# Altium PCB sensor_zigbee_pcb.PcbDoc
Units mil, origin at the board's own origin, x right, y up, seen from the top; angles counter-clockwise.
Board outline 1181.1 x 1574.8 mil, 2 copper layers (Top Layer, Bottom Layer); 24 components, 20 nets, 111 pads, 24 vias.
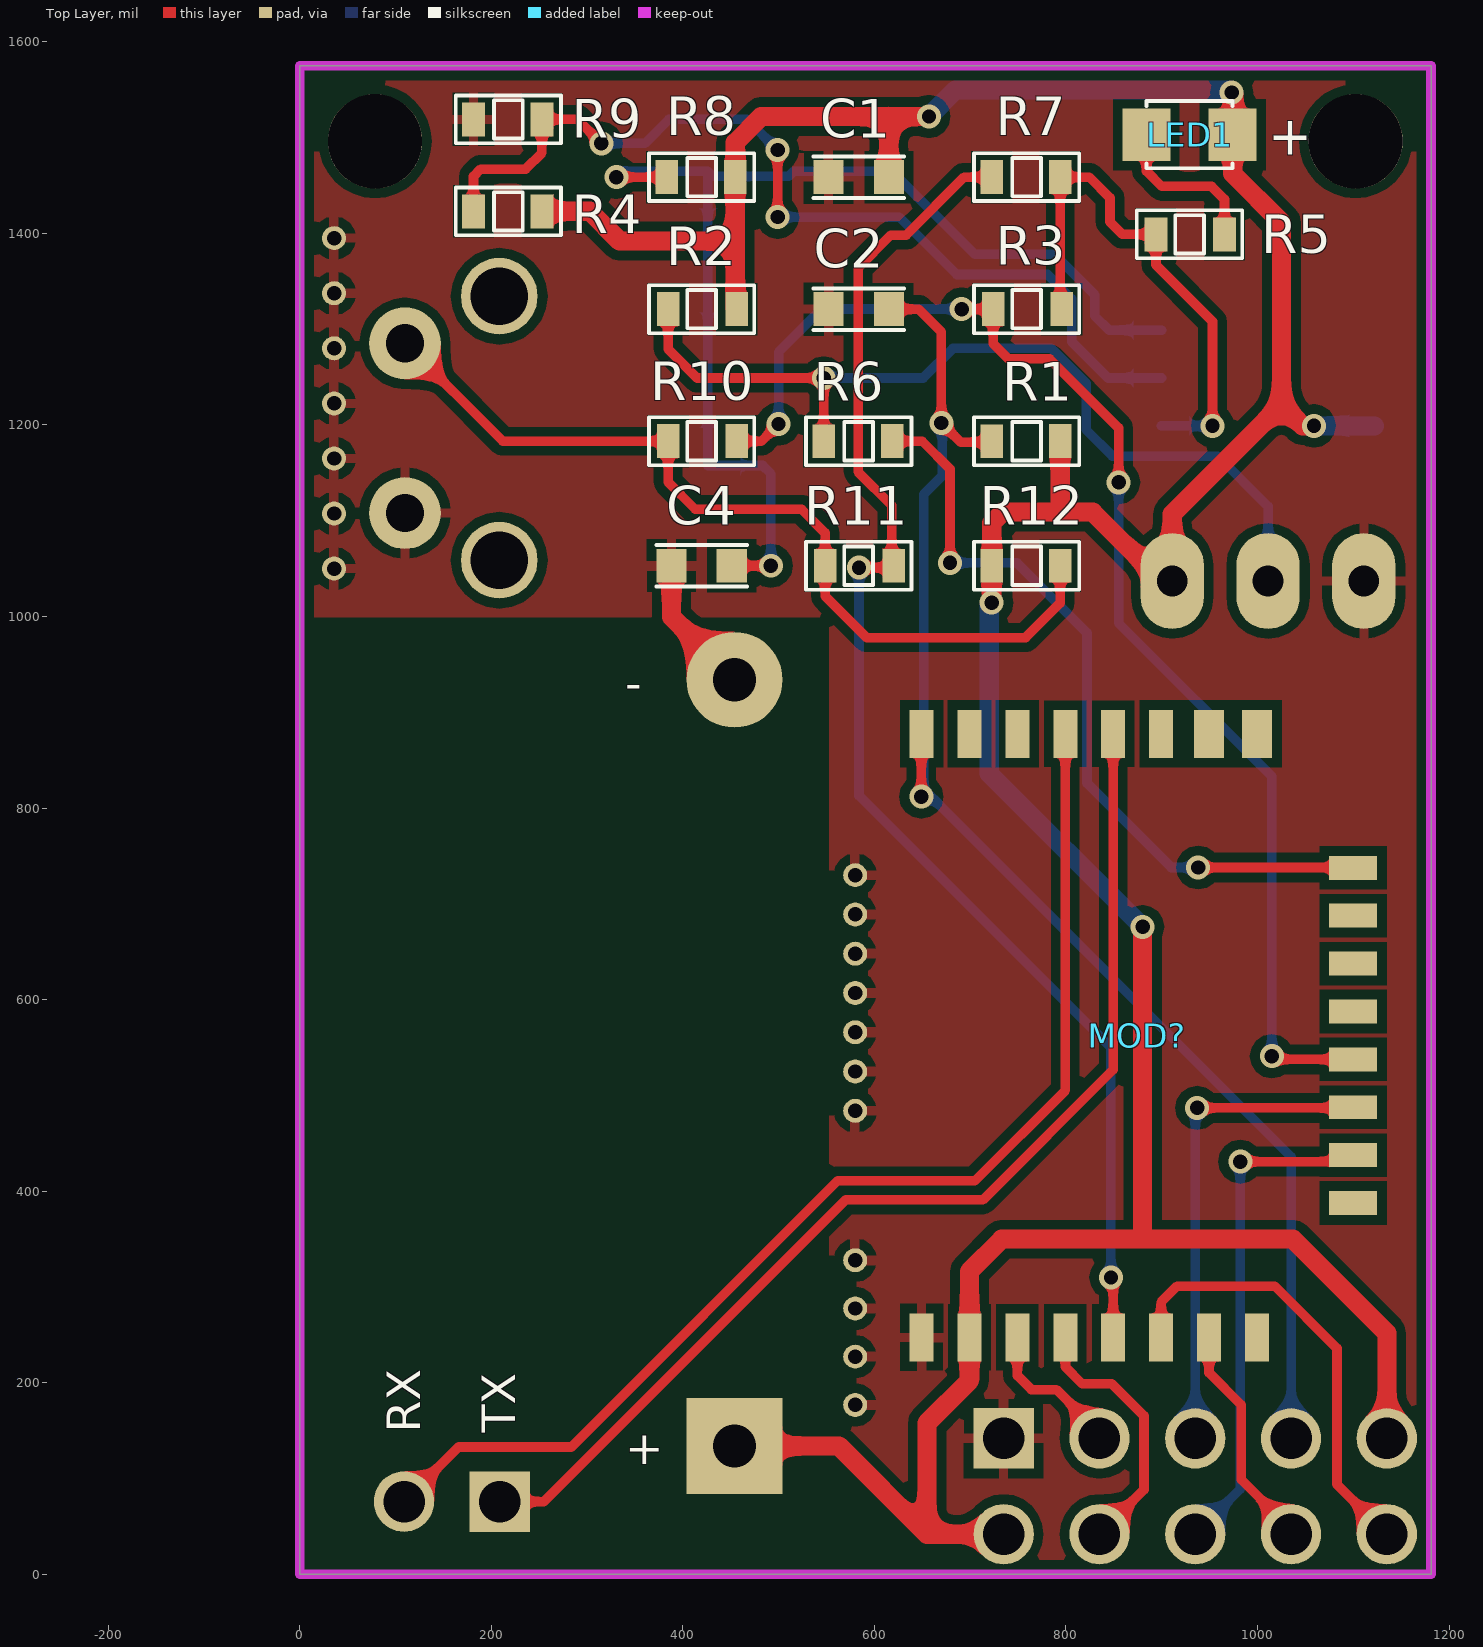
[diagram p0: Top Layer view]
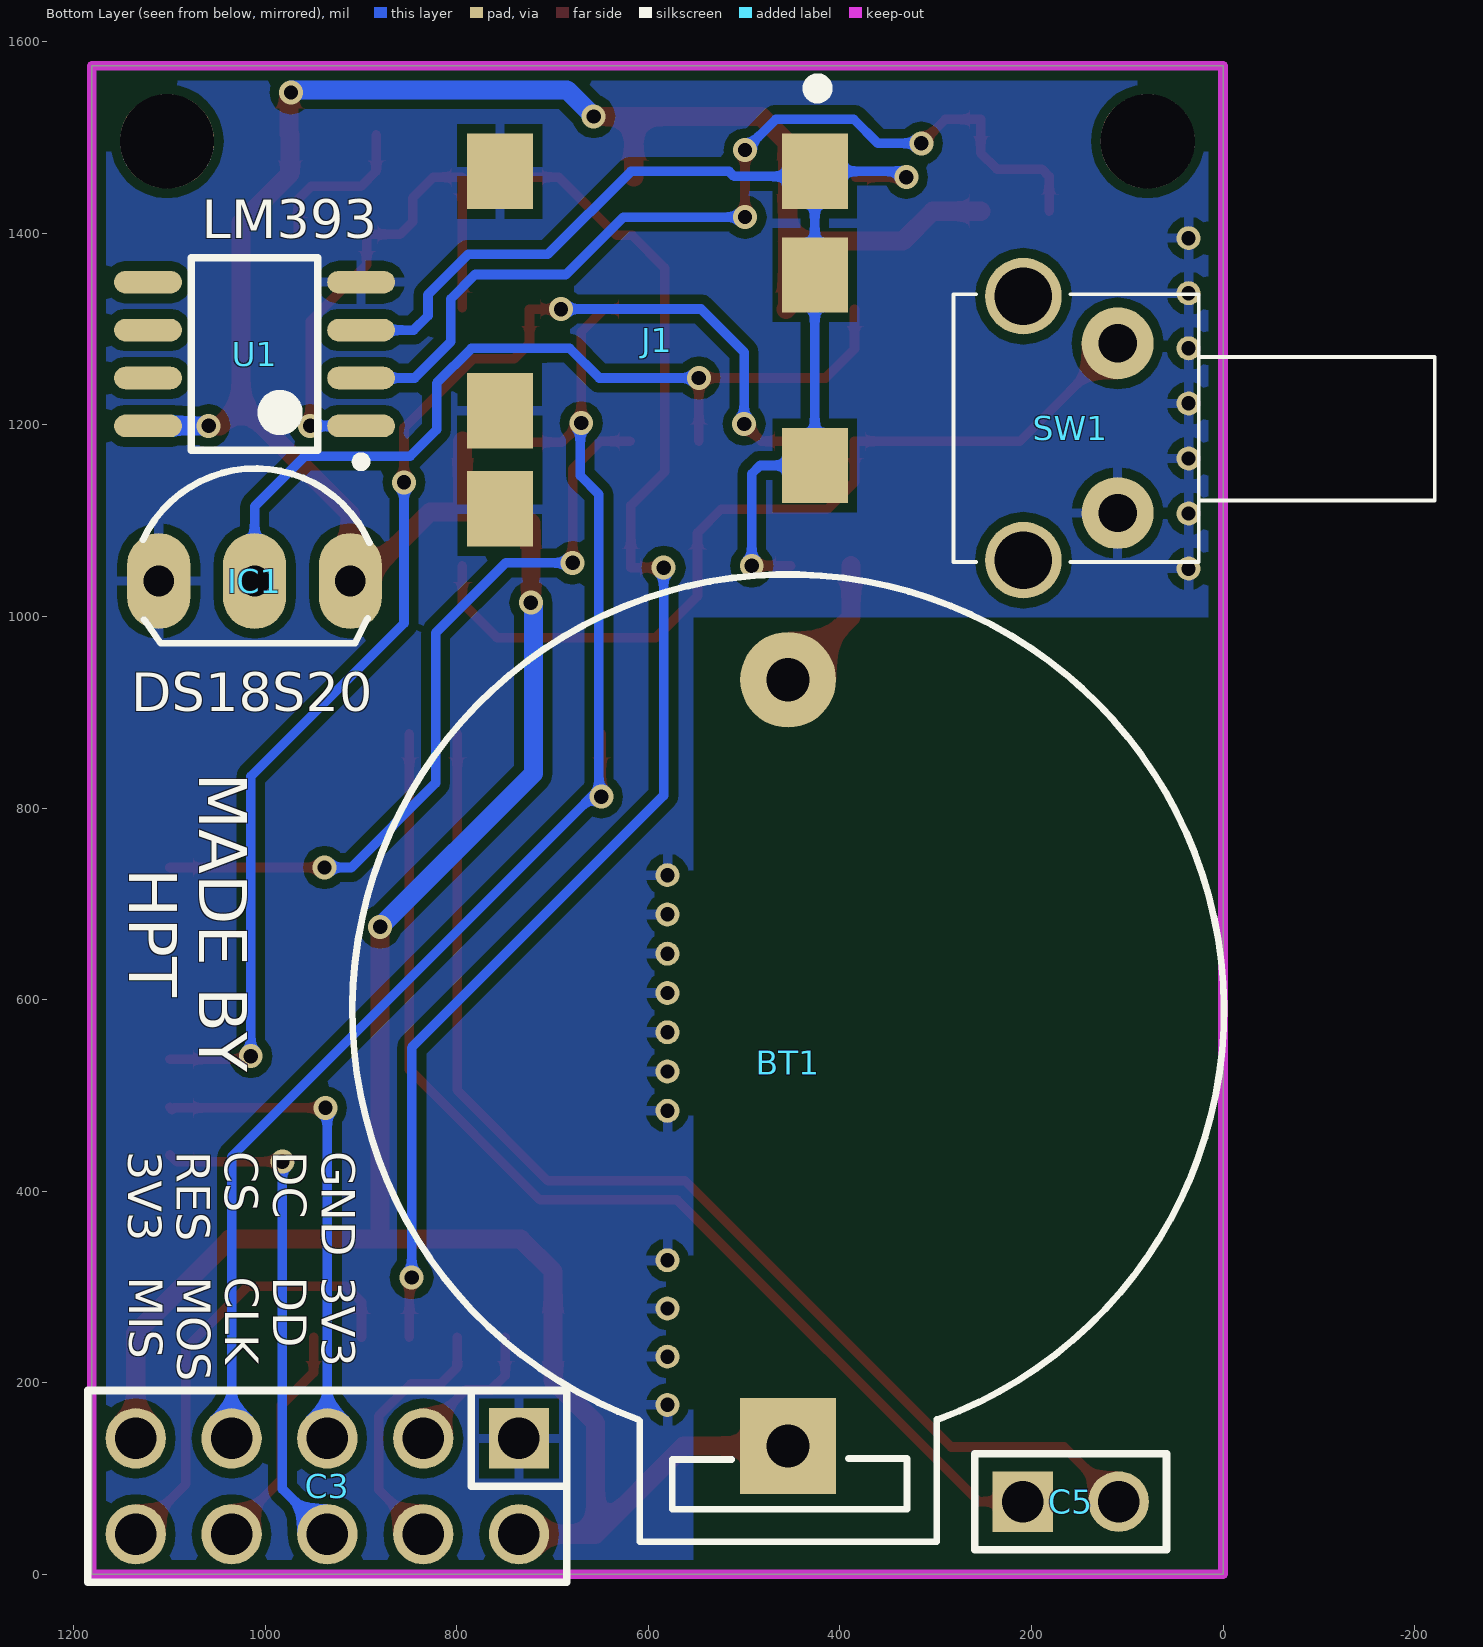
[diagram p1: Bottom Layer view, seen from below]
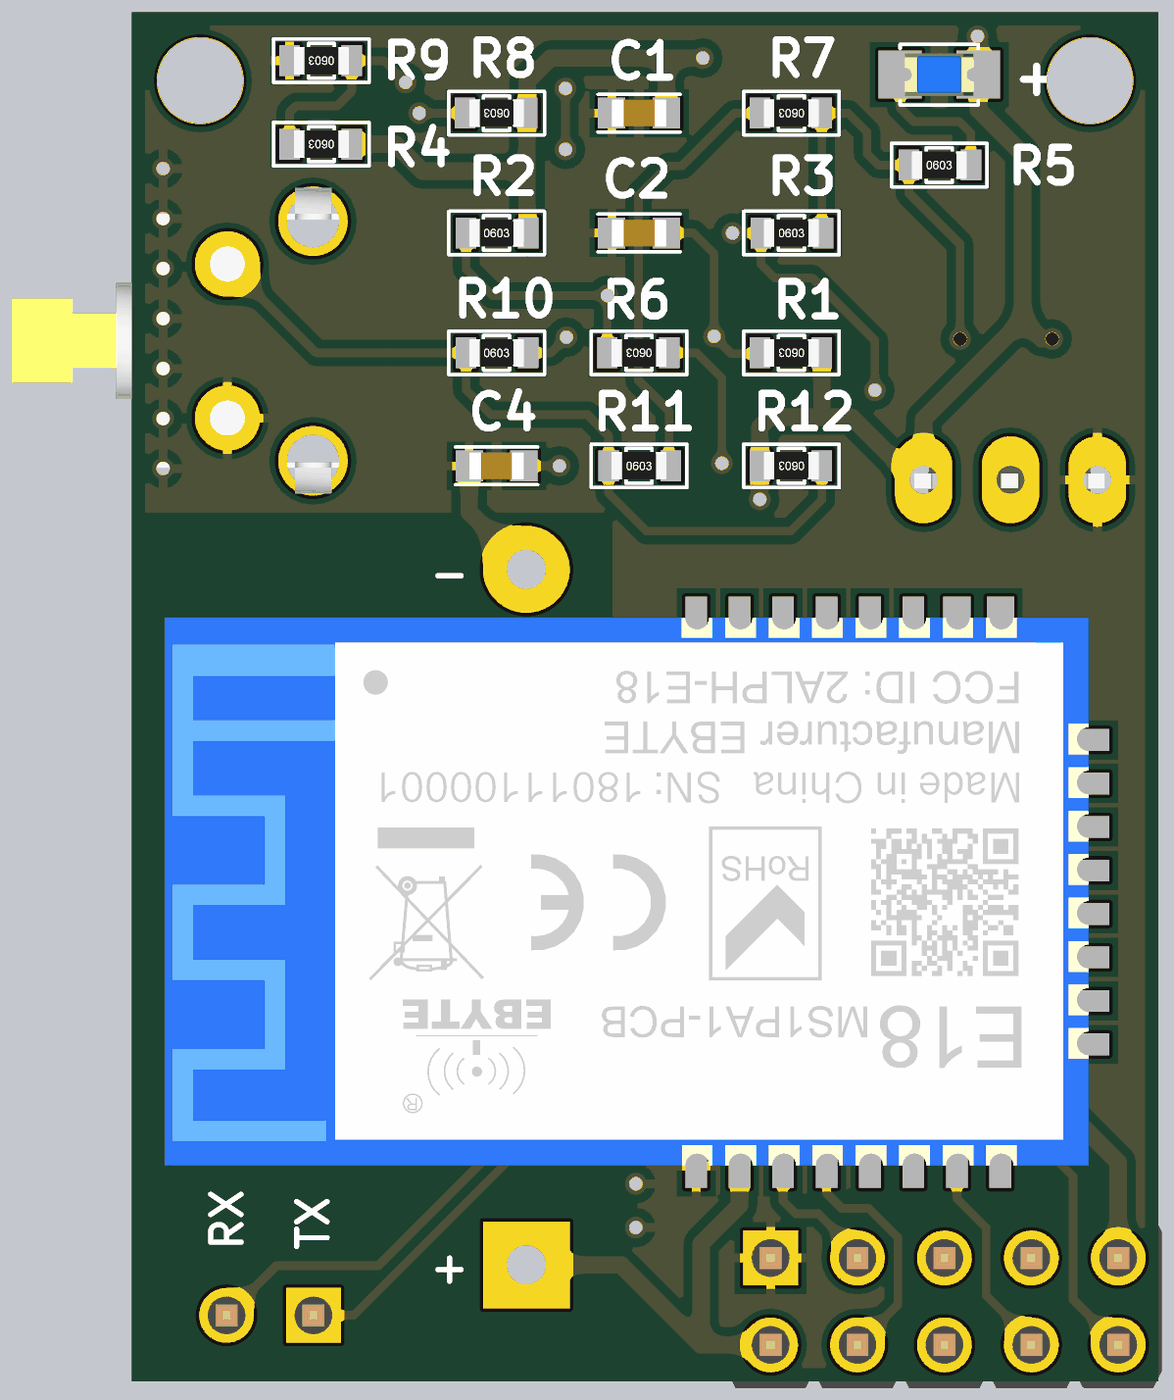
[diagram p2: 3D render of the assembled board from above, using the file's embedded part models]
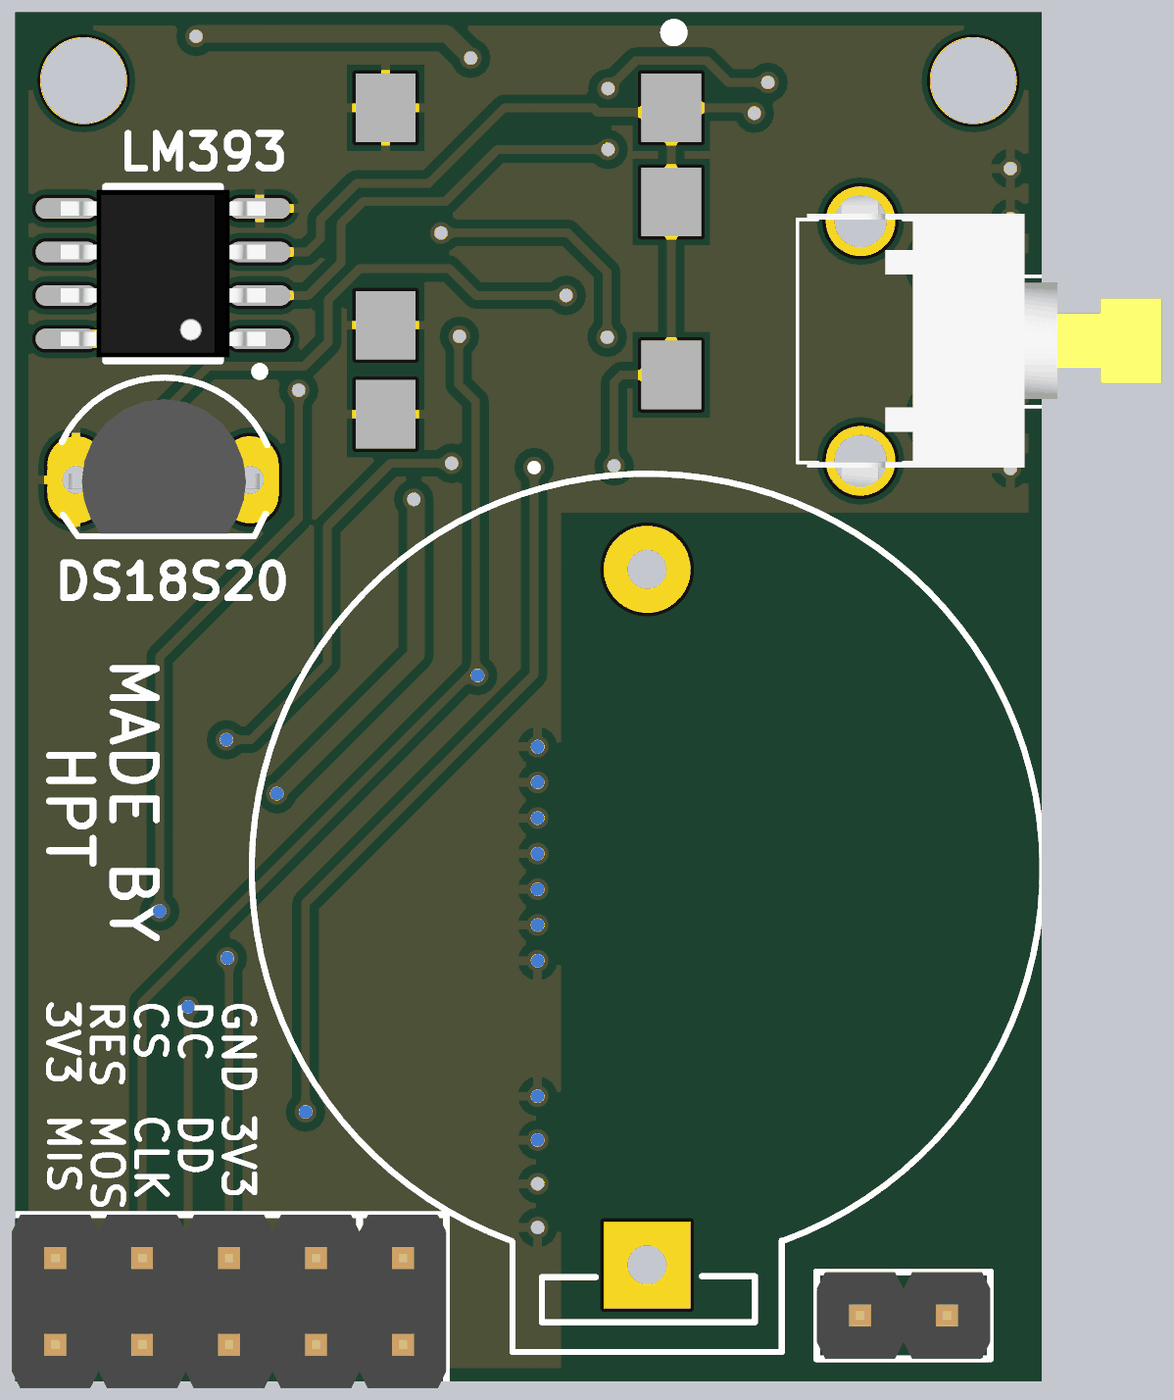
[diagram p3: 3D render of the assembled board from below, using the file's embedded part models]

## Layer stack, top to bottom
Top Solder: solder mask 0.4, Solder Resist, Dk 3.5
Top Layer: signal copper 1.4
Dielectric 1: dielectric 12.6, FR-4, Dk 4.8
Bottom Layer: signal copper 1.4
Bottom Solder: solder mask 0.4, Solder Resist, Dk 3.5

## Board outline
0,0 1181.1,0 1181.1,1574.8 0,1574.8

## Design rules (kind name [scope] priority, off if disabled: settings)
Clearance [All] p1: gap=10
PolygonConnect [All] p1: connectstyle=Relief reliefconductorwidth=10 reliefentries=4 polygonreliefangle="90 Angle" airgapwidth=10
RoomDefinition sensor_zigbee_schematic [InComponentClass('sensor_zigbee_schematic')] p1: confinementstyle=ConfineIn formatcopy=TRUE lockcomponents=FALSE outline -1230,-2375 770,-2375 770,-1375 -1230,-1375
RoutingVias [All] p1: holewidth=15 width=25 viastyle="Through Hole" minholewidth=15 minwidth=25 maxholewidth=28 maxwidth=50
SolderMaskExpansion [All] p1: expansion=4
Width [All] p1: maxlimit=50 minlimit=10 preferedwidth=10
30 further rules are at their usual default settings.

## Components (designator, comment, footprint, x,y, rotation, side; value= is the part's Value field where it differs from the comment)
BT1 "PIN 3V" PIN3V 454,134 r90 bottom
C1 "Capacitor SMD" CAP_0603 583.64,1458.65 r0 top
C2 "Capacitor SMD" CAP_0603 583.64,1320.83 r0 top
C3 "JP5x2" JP5-D2T 935,92 r0 bottom
C4 "Capacitor SMD" CAP_0603 419.72,1053 r0 top
C5 "JP2" JP2-D1T 209,76 r180 bottom
IC1 "DS18S20" DS18S20 1011,1037 r180 bottom
J1 "SJ-43504-SMT-TR" CUI_SJ-43504-SMT-TR 590.55,1325 r270 bottom
LED1 "+" LED-0805-Blue 974,1503 r180 top
MOD? "EBYTE-LORA-ZIGBEE-MODULE" EBYTE-LORA-ZIGBEE-MODULE 1185,862 r270 top
R1 "10K" RES-SMD-0603 759,1183 r180 top
R2 "4.7K" RES-SMD-0603 419.73,1320.83 r0 top
R3 "0R" RES-SMD-0603 759.01,1320.83 r0 top
R4 "10K" RES-SMD-0603 218,1423 r180 top
R5 "1K" RES-SMD-0603 929,1399 r0 top
R6 "0R" RES-SMD-0603 583.64,1183 r180 top
R7 "0R" RES-SMD-0603 759,1458.65 r180 top
R8 "10K" RES-SMD-0603 419.72,1458.65 r180 top
R9 "10K" RES-SMD-0603 217.99,1519 r180 top
R10 "10K" RES-SMD-0603 419.73,1183 r0 top
R11 "10K" RES-SMD-0603 583.64,1053 r0 top
R12 "10K" RES-SMD-0603 759,1053 r180 top
SW1 "SW" SW1-DIP 110,1108 r90 bottom
U1 "LM393" SO8 1011,1274 r0 bottom

## Footprints (in the part's own frame and the unit in brackets; to place one, negate y for a bottom-side part, rotate by r counter-clockwise, add the part's x,y. Pads: shape width x height; smd on the part's side, far side on the other; paste and mask are expansions set on the pad)
CAP_0603 [mm]
  rect 0.8x0.9 smd: 1(-0.8,0) 2(0.8,0)
  silkscreen extent -1.2,-0.55 1.2,0.55, body extent -0.8,-0.4 0.8,0.4, height 0.9
CUI_SJ-43504-SMT-TR [mm]
  rect 2x1.75 smd: 1(-3.55,4.175) 2(2.8,-4.175) 3(-0.8,4.175) 4(-3.55,-4.175) 5(5.4,-4.175) 6(4.25,4.175)
  silkscreen extent -5.95,4.05 -5.55,4.45
DS18S20 [mil] "TO-92"
  oval 66x100 hole 32: 3(100,0) 4(0,0) 5(-100,0)
  silkscreen extent -117,-65 120,118, body extent -109,-62 111,93, height 119
EBYTE-LORA-ZIGBEE-MODULE [mil]
  rect 50x25 smd: 1(614.46,-535.65) 2(614.46,-485.65) 3(614.46,-435.65) 4(614.46,-385.65) 5(614.46,-335.65) 6(614.46,-285.65) 7(614.46,-235.65) 8(614.46,-185.65) 19(-15.46,-285.65) 20(-15.46,-335.65) 21(-15.46,-385.65) 22(-15.46,-435.65) 23(-15.46,-485.65) 24(-15.46,-535.65)
  rect 25x50 smd: 9(474.3,-85.25) 10(424.3,-85.25) 11(374.3,-85.25) 12(324.3,-85.25) 13(274.3,-85.25) 14(224.3,-85.25) 15(174.3,-85.25) 16(124.3,-85.25)
  rect 50x31.5 smd: 17(-15.46,-185.65) 18(-15.46,-235.65)
  body extent -17,-1147 614,-84, height 107
JP2-D1T [mm] "2 pins, 1 row, straight, gold plating"
  rect 1.6x1.6 hole 1.1: 1(0,0)
  round 1.6 hole 1.1: 2(2.54,0)
  silkscreen extent -1.27,-1.27 3.81,1.27, body extent -1.27,-1.27 3.81,1.27, height 8.54
JP5-D2T [mm] "10 pins, dual pin, straight, gold plating"
  rect 1.6x1.6 hole 1.1: 1(-5.08,-1.27)
  round 1.6 hole 1.1: 2(-2.54,-1.27) 3(0,-1.27) 4(2.54,-1.27) 5(5.08,-1.27) 6(5.08,1.27) 7(2.54,1.27) 8(0,1.27) 9(-2.54,1.27) 10(-5.08,1.27)
  silkscreen extent -6.35,-2.54 6.35,2.54, body extent -6.35,-2.54 6.35,2.54, height 8.55
LED-0805-Blue [mil]
  rect 50x55 smd: 1(0,0) 2(90,0)
  silkscreen extent 0,-35 90,35, body extent 5,-25 85,25, height 43
PIN3V [mil] "Socket PIN 3V"
  rect 100x100 hole 45: 1(0,0)
  round 100 hole 45: 2(800,0)
  silkscreen extent -100,-455 910,455
RES-SMD-0603 [mm]
  rect 0.6x0.9 smd: 1(-0.889,0) 2(0.927,0)
  silkscreen extent -1.4,-0.64 1.4,0.64, body extent -0.8,-0.4 0.8,0.4, height 0.43
SO8 [mm] "SOIC, 8-Leads, Body 4.9x3.9mm, Pitch 1.27mm, IPC High Density"
  oval 1.8x0.6 smd: 1(-2.825,1.905) 2(-2.825,0.635) 3(-2.825,-0.635) 4(-2.825,-1.905) 5(2.825,-1.905) 6(2.825,-0.635) 7(2.825,0.635) 8(2.825,1.905)
  silkscreen extent -2.95,-2.55 1.68,2.98, body extent -2.99,-2.45 3,2.45, height 1.6
SW1-DIP [mil]
  round 75 hole 40: 1(0,0) 2(177.16,0)
  round 80 hole 60: ""(-49.21,98.42) ""(226.38,98.42)
  silkscreen extent -51,-331 228,171, body extent -87,-398 265,160, height 283

## Part data
BT1: "Battery 3VDC"
C3: "WR-PHD 2.54 mm Dual Socket Header"
C5: "WR-PHD 2.54 mm Angled Socket Header"
IC1: "High Precision  1-Wire® Digital Thermometer"
J1: "3.5 mm, 4 Conductors, Right Angle, Mid Mount _SMT_, Dual Switches, Shielded, Audio Jack Connector"
LED1: library part "LED SMD"
R1 R2 R3 R4 R5 R6 R7 R8 R9 R10 R11 R12: library part Res-SMD, "Resistor"
SW1: library part SW2, "Switch button 2 pin"
U1: "IC DUAL COMPARATOR"

## Free pads (board coordinates)
  round 98.43 hole 98.43: 0(78.74,1496.06) 1(1102.36,1496.06)
  round 25 hole 15: 2(580,730) 3(580,689) 4(580,648) 5(580,607) 6(580,566) 7(580,525) 8(580,484) 9(36,1395) 10(36,1337.5) 11(36,1280) 12(36,1222.5) 13(36,1165) 14(36,1107.5) 15(36,1050) 16(580,328) 17(580,277.67) 18(580,227.33) 19(580,177)

## Via types
v1: diameter 25, hole 15, Top Layer to Bottom Layer, tented both sides, 24 vias

## Nets (pads, with @x,y where several pads share a name; then routed paths per layer and width w, separated by ;. In a path a pad name is that pad's centre, name@x,y a point inside that pad or via, vN(x,y) a via of type N, cw(c..) or ccw(c..) an arc to the next point about the centre after c; other vN are vias at no path point)
3V3: BT1.1 C1.2 C3.5 C3.10 IC1.3 LED1.1 MOD?.2 R1.1 R2.2 R4.1 R8.1 R12.2 U1.8 | length 4009.8
  Top Layer w20: R4.1 303,1423 334,1392 454.72,1392 ; BT1.1 563,134 655,42 ; R2.2 454.72,1322.32 454.72,1392 ; C1.2 615.14,1522 ; v1(657,1522) 615.14,1522 ; v1(722.51,1014.51) R12.2 722.51,1097.51 734,1109 790,1109 ; C3.10 655,42 ; R1.1 794,1113 790,1109 ; v1(880,676) 880,352 878,350 ; v1(973,1547) 975,1547 975,1504 LED1.1 974,1462.36 1025,1411.36 1025,1221 ; v1(1059,1199) 1047,1199 1025,1221 ; C3.5 1135,252 1037,350 878,350 ; 454.72,1392 R8.1 454.72,1494.72 482,1522 615.14,1522 ; 655,42 655,158 699.35,202.35 MOD?.2 699.35,316.35 733,350 878,350 ; 790,1109 828,1109 900,1037 IC1.3 911,1107 1025,1221
  Bottom Layer w20: v1(657,1522) 684.8,1549.8 973,1549.8 v1(973,1547) ; v1(722.51,1014.51) 720,1012 720,836 v1(880,676) ; v1(1059,1199) U1.8
CLK: C3.8 MOD?.10 | length 529.2
  Top Layer w10: v1(982,431) 1092.45,431 1099.45,438 MOD?.10
  Bottom Layer w10: C3.8 982,89 v1(982,431)
CS: C3.3 MOD?.11 | length 510.5
  Top Layer w10: v1(937,487) 1095.05,487 1097.05,485 MOD?.11
  Bottom Layer w10: C3.3 935,485 v1(937,487)
DC: C3.2 MOD?.3 | length 156.2
  Top Layer w10: MOD?.3 749.35,207.65 764,193 790,193 835,148 C3.2
DD: C3.9 MOD?.4 | length 277
  Top Layer w10: MOD?.4 799.35,216.65 817,199 848,199 881.5,165.5 881.5,88.5 C3.9
DIG_IN: MOD?.5 R7.2 R11.2 | length 1453.8
  Top Layer w10: v1(584,1051) 618.13,1051 618.13,1115.87 583,1151 583,1364 617,1398 633,1398 693.65,1458.65 R7.2 ; v1(847,310) 849.35,307.65 MOD?.5
  Bottom Layer w10: v1(584,1051) 584,813 847,550 v1(847,310)
GND: BT1.2 C1.1 C2.1 C3.1 C4.1 IC1.5 J1.2 J1.4 J1.5 MOD?.1 pad.2 pad.3 pad.4 pad.5 pad.6 pad.7 pad.8 pad.9 pad.10 pad.11 pad.12 pad.13 pad.14 pad.15 pad.16 pad.17 pad.18 pad.19 R9.2 SW1.1 U1.4 | length 146.2
  Top Layer w20: C4.1 388.23,999.77 BT1.2
KEY: MOD?.12 R3.1 R10.2 | length 1380.6
  Top Layer w10: R10.2 482,1183 v1(500,1201) ; v1(691.17,1320.83) R3.1 724,1285 740,1269 783,1269 855,1197 v1(855,1140) ; v1(1015,541) 1018.3,537.7 MOD?.12
  Bottom Layer w10: v1(500,1201) 500,1276 545,1321 691,1321 v1(691.17,1320.83) ; v1(855,1140) 855,993 1015,833 v1(1015,541)
MISO: C3.6 MOD?.6 | length 469.8
  Top Layer w10: MOD?.6 899.35,284.35 916,301 1018,301 1083,236 1083,94 C3.6
MOSI: C3.7 MOD?.7 | length 241
  Top Layer w10: MOD?.7 949.35,210.65 983,177 983,99 1035,47 C3.7
NetC4_2: C4.2 J1.1 J1.3 J1.6 R8.2 U1.3 | length 1223.4
  Top Layer w10: v1(330.65,1458.65) R8.2 ; C4.2 v1(492,1053)
  Bottom Layer w10: v1(330.65,1458.65) 336.76,1464.76 J1.1 ; v1(492,1053) 492,1149 483.32,1157.68 J1.6 J1.3 J1.1 ; U1.3 845,1299 830,1314 830,1336 788,1378 705,1378 618.24,1464.76 515.65,1464.76 510.39,1459.5 431.44,1459.5 J1.1
NetIC1_4: IC1.4 R2.1 R6.2 | length 934.1
  Top Layer w10: R2.1 384.72,1279.28 415,1249 v1(547.15,1249) R6.2
  Bottom Layer w10: v1(547.15,1249) 651,1249 682,1280 784.72,1280 821,1243.72 821,1195 848.5,1167.5 958.5,1167.5 1011,1115 IC1.4
NetLED1_2: LED1.2 R5.2 | length 168.2
  Top Layer w10: LED1.2 884,1465 900,1449 952,1449 965.49,1435.51 R5.2
NetR3_2: R3.2 R5.1 R7.1 U1.1 | length 553.3
  Top Layer w10: R3.2@794,1322.32 R7.1 824.35,1458.65 846,1437 846,1412 859,1399 R5.1 894,1367 953,1308 v1(953,1199)
  Bottom Layer w10: U1.1 v1(953,1199)
NetR4_2: R4.2 R9.1 U1.2 | length 999.8
  Top Layer w10: R4.2 181.51,1459.51 189,1467 236,1467 253,1484 R9.1 290,1519 v1(315,1494) ; v1(499,1417) v1(499,1487)
  Bottom Layer w10: v1(315,1494) 360.39,1494 385.52,1519.13 466.87,1519.13 v1(499,1487) ; v1(499,1417) 626,1417 686,1357 780.72,1357 806,1331.72 806,1287 844,1249 U1.2
NetR10_1: R10.1 R11.1 R12.1 SW1.2 | length 928.8
  Top Layer w10: SW1.2 212.16,1183 R10.1 384.72,1140.28 413,1112 524,1112 548.64,1087.36 R11.1 548.64,1021.36 592,978 758,978 794,1014 R12.1
RESET: C2.2 C3.4 MOD?.24 R1.2 | length 1523.8
  Top Layer w10: C2.2 646.17,1320.83 670,1297 v1(670,1202) 690,1182 721.52,1182 R1.2 ; v1(649,812) 649,877.11 MOD?.24
  Bottom Layer w10: v1(670,1202) 671,1203 671,1147 651.5,1127.5 651.5,814.5 v1(649,812) 659,812 1035,436 C3.4
RX: C5.2 MOD?.21 | length 1240.3
  Top Layer w10: C5.2 166,133 283.72,133 561.72,411 705,411 799.35,505.35 MOD?.21
SENSOR: MOD?.16 R6.1 | length 814.9
  Top Layer w10: R6.1 650,1183 679,1154 v1(679,1056) ; v1(938,738) 1099.45,738 MOD?.16
  Bottom Layer w10: v1(679,1056) 749,1056 822,983 822,826 910,738 v1(938,738)
TX: C5.1 MOD?.20 | length 1177.6
  Top Layer w10: C5.1 255,76 570,391 713.28,391 849.35,527.07 MOD?.20
pads on no net: MOD?.8 MOD?.9 MOD?.13 MOD?.14 MOD?.15 MOD?.17 MOD?.18 MOD?.19 MOD?.22 MOD?.23 SW1. U1.5 U1.6 U1.7

## Polygon pours and split planes (outlines as drawn)
GND on Top Layer "Top Layer-No Net" (solid, remove dead copper, pour order 0): 0,1574.8 0,999 553,999 553,0 1181.1,0 1181.1,1574.8
GND on Bottom Layer "Top Layer-No Net" (solid, remove dead copper, pour order 2): 0,1574.8 0,999 553,999 553,0 1181.1,0 1181.1,1572

## Keep-outs
Keep-Out Layer:
  the board outline again, w10

## Silkscreen, mask and mechanical layers (free items; w line width, h text height)
Top Overlay:
  text "-" at 340,913 h35
  text "RX" at 126,148 h35 r90
  text "TX" at 225,148 h35 r90
  text "+" at 340,115 h35
Bottom Overlay:
  text "MADE BY" at 1069,837 h50 r90
  text "HPT" at 1142,737.03 h50 r90
  text "GND" at 941,442 h35 r90
  text "DC" at 991.5,442 h35 r90
  text "CS" at 1042,442 h35 r90
  text "RES" at 1092.5,442 h35 r90
  text "3V3" at 1143,442 h35 r90
  text "3V3" at 941,311 h35 r90
  text "DD" at 991.25,311 h35 r90
  text "CLK" at 1041.5,311 h35 r90
  text "MOS" at 1091.75,311 h35 r90
  text "MIS" at 1142,311 h35 r90

## Text inside footprints (layer, text, board x,y; h text height)
MOD?: Mechanical 7 "-IPX" at 233.6,405.02 h61.02 r270; Mechanical 7 "-PCB" at 56.44,405.02 h61.02 r270